# EAGLE board atmega328Pruebas3 (EAGLE 7.6.0)
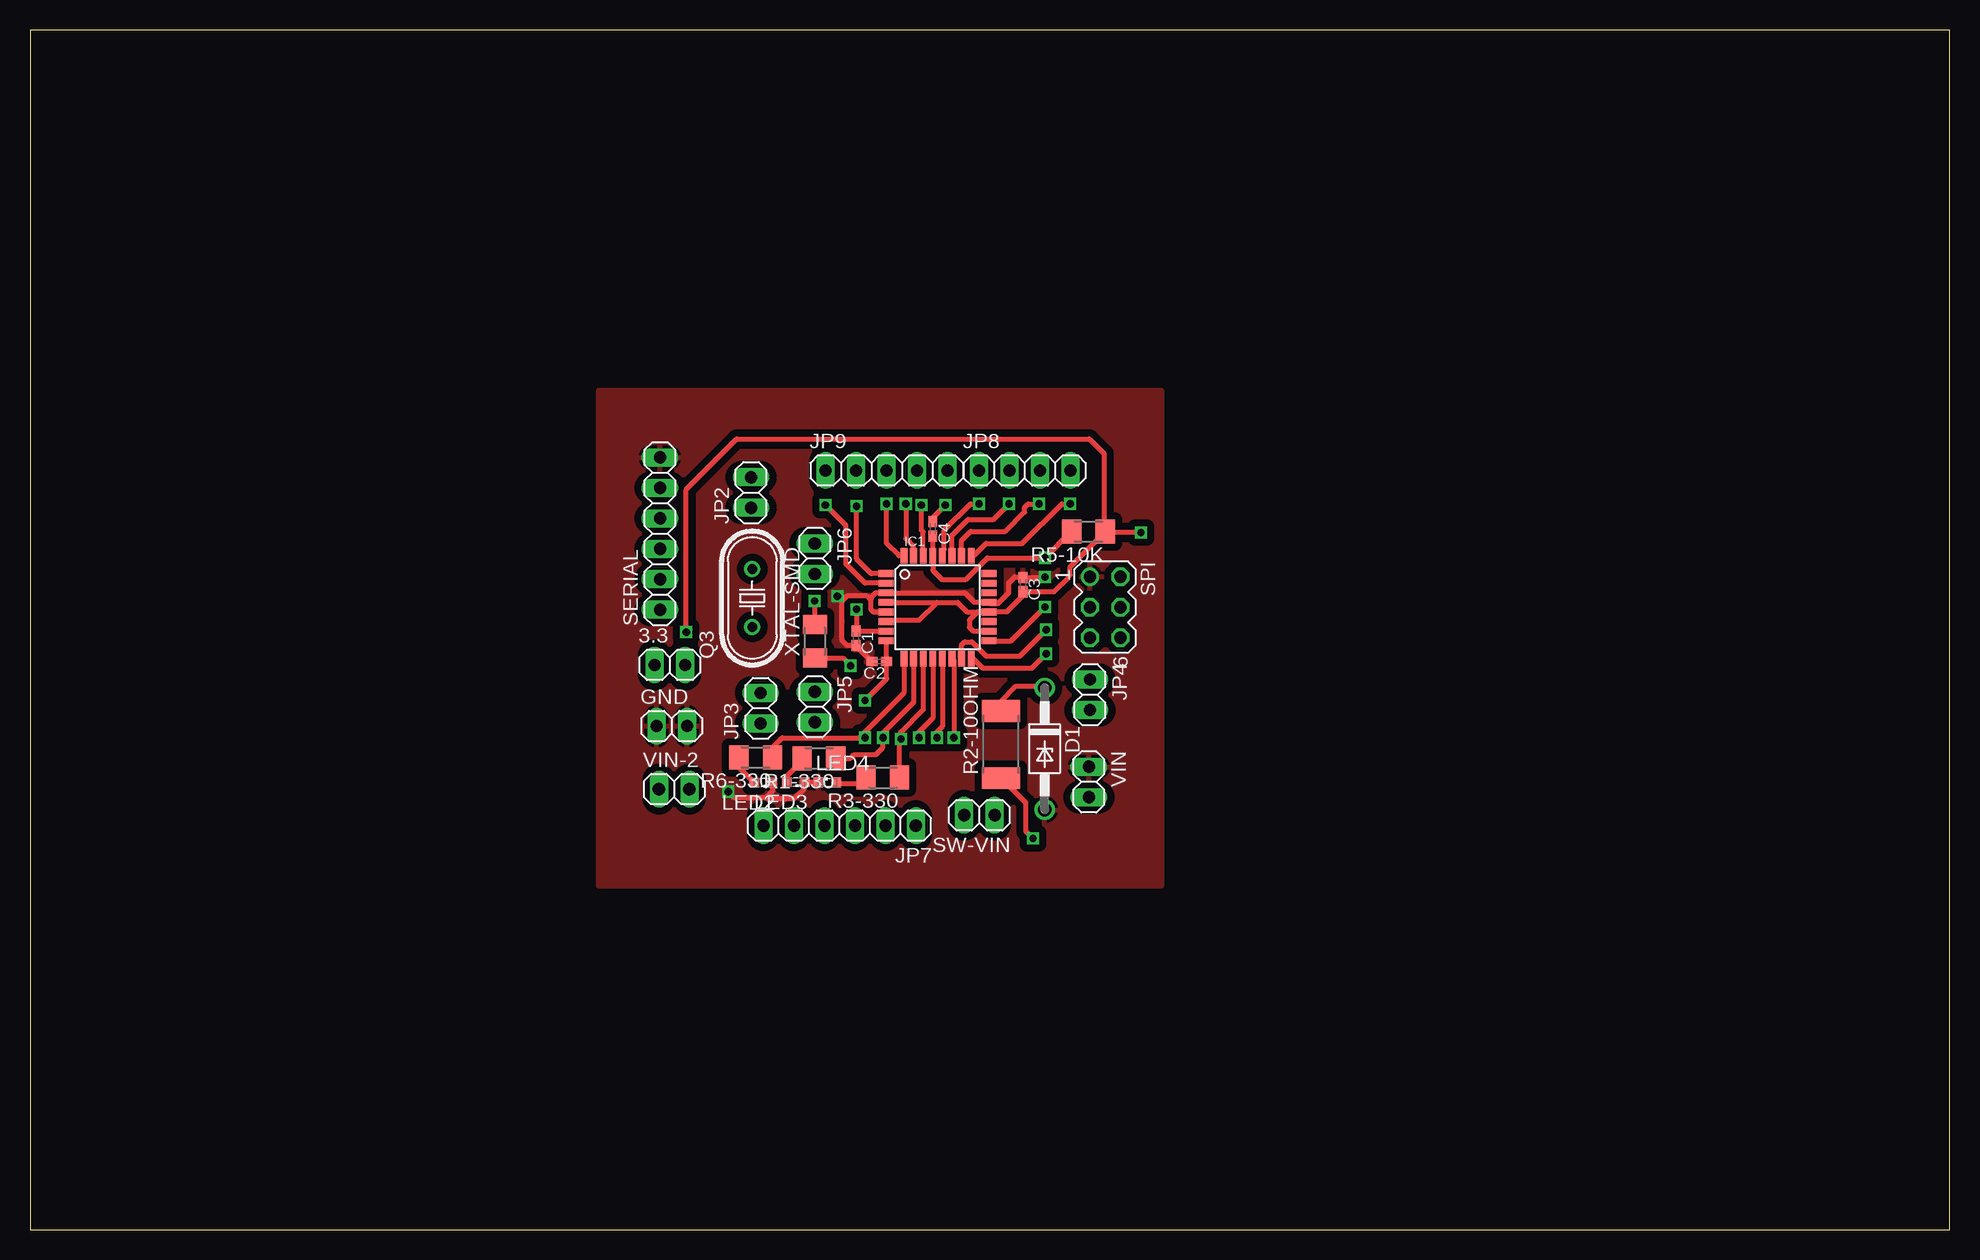
[diagram p0: board, top side]
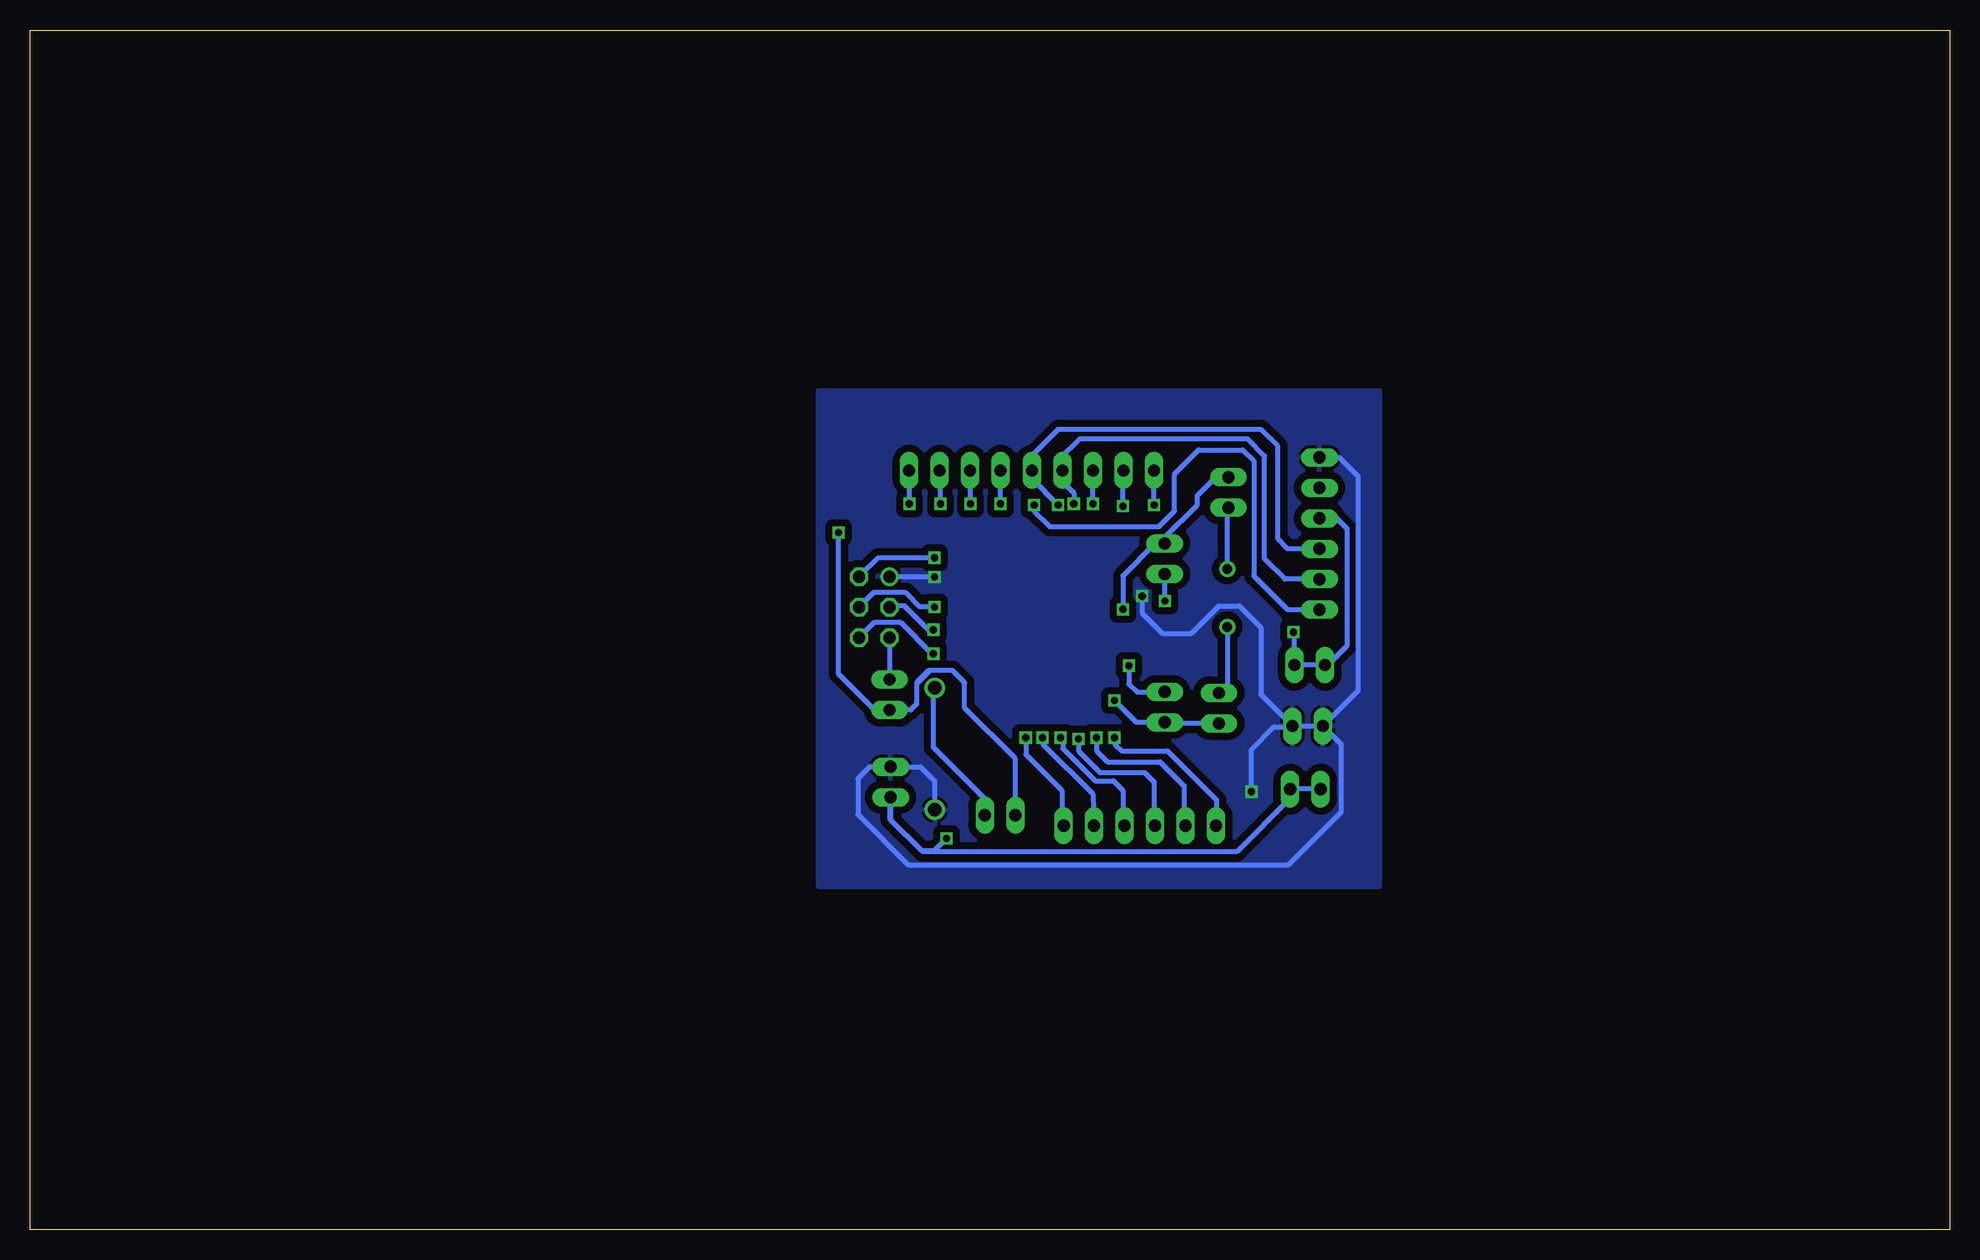
[diagram p1: board, bottom side, seen from below]

Size 160 x 100 mm. Coordinates in mm from the lower left corner, seen from the top.
Outline: 0,0 160,0 160,100 0,100 0,0
Copper layers (1*16): Top 0.035mm / dielectric 1.5mm / Bottom 0.035mm
Design rules "default": minimum track width 10mil, minimum drill 24mil, track to track 8mil, track to pad 8mil, pad to pad 8mil, via to via 8mil, smd to smd 8mil, copper to edge 40mil, drill to drill 8mil, minimum pad ring 10mil, minimum via ring 8mil, stop-mask expansion 4mil, vias tented up to drill 0mil, thermal gap 10mil

## Footprints (pad centres in the part's own frame; a part is rotated, then mirrored left to right if it is on the bottom)
1X02 = drill 1.016 long: 1 -1.27,0; 2 1.27,0
C0402K = smd 0.925 x 0.74: 1 -0.6,0; 2 0.6,0
DO41Z10 = drill 1.118: A 5.08,0; C -5.08,0
TQFP32-08 = smd 1.27 x 0.559: 1 -4.293,2.8; 2 -4.293,2; 3 -4.293,1.2; 4 -4.293,0.4; 5 -4.293,-0.4; 6 -4.293,-1.2; 7 -4.293,-2; 8 -4.293,-2.8; 17 4.293,-2.8; 18 4.293,-2; 19 4.293,-1.2; 20 4.293,-0.4; 21 4.293,0.4; 22 4.293,1.2; 23 4.293,2; 24 4.293,2.8 | smd 0.559 x 1.27: 9 -2.8,-4.293; 10 -2,-4.293; 11 -1.2,-4.293; 12 -0.4,-4.293; 13 0.4,-4.293; 14 1.2,-4.293; 15 2,-4.293; 16 2.8,-4.293; 25 2.8,4.293; 26 2,4.293; 27 1.2,4.293; 28 0.4,4.293; 29 -0.4,4.293; 30 -1.2,4.293; 31 -2,4.293; 32 -2.8,4.293
1X06 = drill 1.016 long: 1 -6.35,0; 2 -3.81,0; 3 -1.27,0; 4 1.27,0; 5 3.81,0; 6 6.35,0
1X04 = drill 1.016 long: 1 -3.81,0; 2 -1.27,0; 3 1.27,0; 4 3.81,0
1X05 = drill 1.016 long: 1 -5.08,0; 2 -2.54,0; 3 0,0; 4 2.54,0; 5 5.08,0
LED_SML0603 = smd 0.8 x 0.8: A 0.75,0; C -0.75,0
HC49U70 = drill 0.813: 1 -2.413,0; 2 2.413,0
M1206 = smd 1.6 x 2: 1 -1.4,0; 2 1.4,0
R2512 = smd 1.8 x 3.2: 1 -2.8,0; 2 2.8,0
MA03-2 = drill 1.016: 1 -2.54,-1.27 | drill 1.016 octagon: 2 -2.54,1.27; 3 0,-1.27; 4 0,1.27; 5 2.54,-1.27; 6 2.54,1.27

## Placement (x,y rotation side)
3.3  [1X02]  53.33,47.07 0 top
C1  [C0402K]  68.85,49.3 270 top
C2  [C0402K]  70.78,47.35 180 top
C3  [C0402K]  82.76,53.77 270 top
C4  [C0402K]  75.25,58.42 270 top
D1  1N4728  [DO41Z10]  84.58,40.08 270 top
GND  [1X02]  53.49,41.97 0 top
IC1  MEGA8-AI  [TQFP32-08]  75.65,51.88 0 top
JP2  [1X02]  60.1,61.44 90 top
JP3  [1X02]  60.9,43.46 90 top
JP4  [1X02]  88.35,44.58 270 top
JP5  [1X02]  65.42,43.56 270 top
JP6  [1X02]  65.42,55.92 270 top
JP7  [1X06]  67.49,33.67 180 top
JP8  [1X04]  82.91,63.28 0 top
JP9  [1X05]  71.4,63.28 0 top
LED2  [LED_SML0603]  61.13,37.25 180 top
LED3  [LED_SML0603]  63.83,37.29 180 top
LED4  [LED_SML0603]  66.47,37.27 0 top
Q3  [HC49U70]  60.2,52.65 90 top
R1-330  [M1206]  65.76,39.29 180 top
R2-10OHM  [R2512]  80.94,40.43 90 top
R3-330  [M1206]  71.09,37.67 180 top
R5-10K  [M1206]  88.23,58.18 180 top
R6-330  [M1206]  60.49,39.35 180 top
SERIAL  [1X06]  52.51,58.02 90 top
SPI  [MA03-2]  89.62,51.88 270 top
SW-VIN  [1X02]  79.14,34.54 180 top
VIN  [1X02]  88.26,37.31 270 top
VIN-2  [1X02]  53.69,36.71 0 top
XTAL-SMD  [M1206]  65.42,49.04 90 top

## Library data of the parts
3.3 GND JP2-JP9 SERIAL SW-VIN VIN VIN-2 = pinhead
C1-C4 R1-330 R3-330 R5-10K R6-330 XTAL-SMD = rcl
D1 = diode
IC1 = atmel; MPN: ATMEGA8-16AU; OC_FARNELL: 9171371; OC_NEWARK: 73M8863
LED2-LED4 = eagle-ltspice; SPICEMODEL: NONE; SPICEPREFIX: D; SPICETYPE: diode
Q3 = crystal; OC_FARNELL: unknown; OC_NEWARK: unknown
R2-10OHM = resistor
SPI = con-lstb; OC_FARNELL: unknown; OC_NEWARK: unknown

## Nets
3.3V: 3.3.1 3.3.2 C3.2 IC1.4 IC1.6 IC1.18 IC1.20 JP4.2 R5-10K.1 SERIAL.4 SW-VIN.2
B0: IC1.12 JP7.3
B1: IC1.13 JP7.2
B2: IC1.14 JP7.1
C2: IC1.25 JP8.4
C3: IC1.26 JP8.3
C4: IC1.27 JP8.2
C5: IC1.28 JP8.1
D2: IC1.32 JP9.3
D3: IC1.1 JP9.2
D4: IC1.2 JP9.1
D5: IC1.9 JP7.6 R6-330.1
D6: IC1.10 JP7.5 R1-330.1
D7: IC1.11 JP7.4 R3-330.1
DTR: C4.1 SERIAL.1
GND: C1.2 C2.2 C3.1 D1.A GND.1 GND.2 IC1.3 IC1.5 IC1.21 LED2.C LED3.C LED4.C SERIAL.6 SPI.1 VIN.1
MISO: IC1.16 SPI.6
MOSI: IC1.15 SPI.3
N$1: D1.C R2-10OHM.2 SW-VIN.1
N$2: R2-10OHM.1 VIN-2.1 VIN-2.2 VIN.2
N$3: JP2.1 Q3.2
N$4: JP3.2 Q3.1
N$5: JP5.1 XTAL-SMD.1
N$6: JP6.2 XTAL-SMD.2
N$7: C1.1 IC1.7 JP2.2 JP6.1
N$8: C2.1 IC1.8 JP3.1 JP5.2
N$9: LED2.A R6-330.2
N$10: LED3.A R1-330.2
N$11: LED4.A R3-330.2
N$12: JP4.1 SPI.5
RST: C4.2 IC1.29 R5-10K.2 SPI.2
RX: IC1.30 JP9.5 SERIAL.3
SCK: IC1.17 SPI.4
TX: IC1.31 JP9.4 SERIAL.2

## Tracks (layer width: path | path; a pad name or v marks a point on that pad's centre or on a via)
3.3V  (via drill 0.6)
  Top 0.406: IC1.4 75.6,52.28 | 75.6,52.28 77.32,52.28 78.1,51.5 79.92,51.5 IC1.20 | IC1.20 78.98,51.48 78.3,50.8 78.3,50.2 78.6,49.9 79.92,49.9 IC1.18 | IC1.6 71.38,50.68 71.5,50.8 74.12,50.8 75.6,52.28 | IC1.20 79.96,51.5 81.4,51.5 82.76,52.86 C3.2 85.37,53.17 86.6,54.4 86.6,54.5 86.7,54.6 86.7,55.25 R5-10K.1 | v92.6,58.1 89.71,58.1 R5-10K.1 | v54.7,49.8 54.7,61.7 58.9,65.9 88.3,65.9 89.5,64.7 89.5,58.31 R5-10K.1
  Bottom 0.406: SW-VIN.2 77.87,39.27 82.1,43.5 82.1,45.6 83.1,46.6 85,46.6 | 85,46.6 85.1,46.6 86.1,45.6 86.1,45.5 | JP4.2 86.6,43.3 86.1,43.8 86.1,45.5 | JP4.2 | SERIAL.4 52.4,59.4 51.2,59.4 50.2,58.4 50.2,48.7 51.83,47.07 3.3.1 3.3.2 54.6,49.7 v54.7,49.8 | 85,46.6 86.1,45.5 | JP4.2 89.6,43.3 92.6,46.3 v92.6,58.1
B0  (via drill 0.6)
  Top 0.406: IC1.12 75.25,42.65 74.1,41.5 v74.1,41
  Bottom 0.406: v74.1,41 73.9,41 73.9,40.1 71.2,37.4 69.7,37.4 68.9,36.6 68.9,34.61 JP7.3
B1  (via drill 0.6)
  Top 0.406: IC1.13 76.05,41.95 75.6,41.5 v75.6,41
  Bottom 0.406: v75.6,41 75.6,40.5 71.4,36.3 JP7.2
B2  (via drill 0.6)
  Top 0.406: IC1.14 76.91,47.59 77,47.5 v77,41
  Bottom 0.406: v77,41 77,39.6 74,36.6 74,34.63 JP7.1
C2  (via drill 0.6)
  Top 0.406: IC1.25 78.67,56.17 79.7,57.2 82.7,57.2 86,60.5 v86.7,60.5
  Bottom 0.406: v86.7,60.5 86.7,63.26 JP8.4
C3  (via drill 0.6)
  Top 0.406: IC1.26 77.65,57.45 78.4,58.2 81.3,58.2 82.9,59.8 82.9,60.2 83.2,60.5 v84.1,60.5
  Bottom 0.406: v84.1,60.5 84.1,63.2 JP8.3
C4  (via drill 0.6)
  Top 0.406: IC1.27 76.85,57.85 78.2,59.2 80.3,59.2 v81.6,60.5
  Bottom 0.406: v81.6,60.5 81.6,63.24 JP8.2
C5  (via drill 0.6)
  Top 0.406: IC1.28 76.05,56.55 76.2,56.7 76.2,58.3 78.4,60.5 v79.1,60.5
  Bottom 0.406: v79.1,60.5 JP8.1
D2  (via drill 0.6)
  Top 0.406: IC1.32 72.43,56.17 71.4,57.2 v71.4,60.5
  Bottom 0.406: v71.4,60.5 JP9.3
D3  (via drill 0.6)
  Top 0.406: IC1.1 70.12,54.68 68.9,55.9 v68.9,60.3
  Bottom 0.406: v68.9,60.3 68.9,63.24 JP9.2
D4  (via drill 0.6)
  Top 0.406: IC1.2 69.62,53.88 68,55.5 68,58.7 v66.3,60.4
  Bottom 0.406: v66.3,60.4 66.3,63.26 JP9.1
D5  (via drill 0.6)
  Top 0.406: IC1.9 72.85,44.75 69.6,41.5 | 69.6,41.5 v69.6,41 | R6-330.1 61.89,40.19 62.7,41 69.1,41 69.6,41.5
  Bottom 0.406: v69.6,41 69.6,40.5 69,39.9 65.2,39.9 61.1,35.8 61.1,34.71 JP7.6
D6  (via drill 0.6)
  Top 0.406: IC1.10 73.65,43.95 71.1,41.4 v71.1,41 71.1,40.2 70.5,39.6 68.7,39.6 68.39,39.29 R1-330.1
  Bottom 0.406: v71.1,41 71.1,39.9 70.2,39 65.8,39 63.8,37 63.8,34.59 JP7.5
D7  (via drill 0.6)
  Top 0.406: IC1.11 74.45,43.35 72.6,41.5 v72.6,40.9 72.49,40.79 R3-330.1
  Bottom 0.406: v72.6,40.9 72.6,39.9 70.8,38.1 67.1,38.1 66.3,37.3 66.3,34.59 JP7.4
DTR  (via drill 0.6)
  Top 0.406: C4.1 75.25,59.35 v76.3,60.4
  Bottom 0.406: v76.3,60.4 76.3,59.9 75,58.6 65.9,58.6 64.6,59.9 64.6,63 62.6,65 58.9,65 58,64.1 58,54.5 55.2,51.7 52.54,51.7 SERIAL.1
GND  (via drill 0.6)
  Top 0.406: LED4.C 64.53,37.27 64.5,37.3 64.5,36.7 63.7,35.9 61.4,35.9 61.3,36 | v84.6,54.4 84.57,54.37 C3.1 82.73,54.4 82.1,54.4 81.6,53.9 81.6,53.1 80.7,52.2 80,52.2 79.94,52.26 IC1.21 79.92,52.3 78.7,52.3 77.92,53.08 IC1.3 70.48,53.08 70.1,52.7 70.1,52.5 | 70.3,51.5 70.1,51.7 70.1,52.5 | 70.3,51.5 71.34,51.5 IC1.5 70.32,51.48 70.3,51.5 | 70.1,52.5 69.8,52.8 68.1,52.8 67.7,52.4 | 68.8,48.7 C1.2 68.85,48.68 C2.2 70.15,47.35 68.8,48.7 | 61.88,36.88 LED2.C 61.9,37.23 61.9,36.6 61.3,36 | 68.8,48.7 68.1,48.7 67.7,49.1 67.7,52.4 | 67.7,52.4 v67.3,52.8 | 61.3,36 58.7,36 v58.2,36.5
  Bottom 0.406: v84.6,54.4 88.33,54.4 SPI.1 | v58.2,36.5 58.2,40 56.3,41.9 54.83,41.9 GND.2 | GND.2 54.73,41.97 54.7,42 52.25,42 GND.1 | v67.3,52.8 67.3,51.4 65.6,49.7 63.2,49.7 60.9,52 59.2,52 57.4,50.2 57.4,44.61 GND.2 | D1.A 84.6,35.02 84.6,37.4 85.78,38.58 VIN.1 90.02,38.58 91,37.6 91,34.6 86.8,30.4 55.1,30.4 50.7,34.8 50.7,40.45 GND.1 | SERIAL.6 50.87,64.37 49.3,62.8 49.3,44.89 GND.1
  pour Bottom (isolate 0.61): 47.5,69.9 94.3,69.9 94.3,28.6 47.5,28.6
  pour Top (isolate 0.61): 47.4,70 94.3,70 94.3,28.6 47.4,28.6 47.4,28.7
MISO  (via drill 0.6)
  Top 0.406: IC1.16 78.61,47.59 79.4,46.8 83.5,46.8 v84.7,48
  Bottom 0.406: v84.7,48 84.8,48 87.4,50.6 89.63,50.6 SPI.6
MOSI  (via drill 0.6)
  Top 0.406: IC1.15 77.65,48.75 77.9,49 78.5,49 79.7,47.8 82.5,47.8 v84.7,50
  Bottom 0.406: v84.7,50 85.1,50 87.1,52 88.23,52 SPI.3
N$1
  Top 0.406: R2-10OHM.2 80.94,44.04 82.2,45.3 84.44,45.3 D1.C
  Bottom 0.406: SW-VIN.1 80.41,35.91 84.7,40.2 84.7,45.04 D1.C
N$2  (via drill 0.6)
  Top 0.406: v83.6,32.6 83,33.2 83,35.57 R2-10OHM.1
  Bottom 0.406: VIN-2.1 VIN-2.2 54.96,35.94 59.4,31.5 85.6,31.5 85.7,31.6 | 88.26,34.16 88.3,34.2 88.3,36 VIN.2 88.26,34.16 | 88.26,34.16 85.7,31.6 | 85.7,31.6 84.6,31.6 v83.6,32.6
N$3
  Bottom 0.406: Q3.2 60.2,60.07 JP2.1
N$4
  Bottom 0.406: Q3.1 60.2,45.43 JP3.2
N$5  (via drill 0.6)
  Top 0.406: XTAL-SMD.1 67.76,47.64 v68.4,47
  Bottom 0.406: v68.4,47 68.4,45.5 67.7,44.8 65.45,44.8 JP5.1
N$6  (via drill 0.6)
  Top 0.406: XTAL-SMD.2 65.42,52.38 v65.4,52.4
  Bottom 0.406: v65.4,52.4 65.4,54.63 JP6.2
N$7  (via drill 0.6)
  Top 0.406: IC1.7 71.34,49.9 C1.1 68.9,49.95 v68.9,51.7
  Bottom 0.406: 65.49,57.19 JP6.1 65.42,57.68 62.7,60.4 62.7,61.2 61.2,62.7 JP2.2 | 65.49,57.19 65.6,57.3 | 65.49,57.19 66.21,57.19 68.9,54.5 v68.9,51.7
N$8  (via drill 0.6)
  Top 0.406: IC1.8 71.36,47.37 C2.1 71.4,47.33 71.4,45.9 v69.6,44.1
  Bottom 0.406: JP5.2 66,42.29 | 66,42.29 67.79,42.29 v69.6,44.1 | JP3.1 65.91,42.2 66,42.29
N$9
  Top 0.406: R6-330.2 59.09,38.54 LED2.A
N$10
  Top 0.406: R1-330.2 64.36,39.06 63.1,37.8 63.1,37.31 LED3.A
N$11
  Top 0.406: LED4.A 67.22,37.22 67.2,37.2 69.22,37.2 R3-330.2
N$12
  Bottom 0.406: SPI.5 JP4.1
RST  (via drill 0.6)
  Top 0.406: IC1.29 75.25,54.95 76,54.2 78,54.2 79.8,56 v84.6,56 86.78,58.18 R5-10K.2 | IC1.29 75.27,56.17 75.3,56.2 | IC1.29 C4.2
  Bottom 0.406: v84.6,56 89.31,56 SPI.2
RX  (via drill 0.6)
  Top 0.406: IC1.30 74.45,58.15 74.3,58.3 v74.3,60.4
  Bottom 0.406: v74.3,60.4 76.5,62.6 76.5,63.26 JP9.5 76.6,63.4 76.6,64.4 74.3,66.7 57.4,66.7 56,65.3 56,57.6 55.15,56.75 SERIAL.3
SCK  (via drill 0.6)
  Top 0.406: IC1.17 81.78,49.08 v84.6,51.9
  Bottom 0.406: v84.6,51.9 85.8,51.9 87,53.1 89.67,53.1 SPI.4
TX  (via drill 0.6)
  Top 0.406: v73,60.5 73,57.6 73.6,57 73.6,56.22 IC1.31
  Bottom 0.406: v73,60.5 73,61.4 73.94,62.34 JP9.4 74.1,63.44 74.1,64.3 72.5,65.9 58.5,65.9 57.1,64.5 57.1,55.9 55.41,54.21 SERIAL.2